# Altium PCB sanati4i4o.PcbDoc
Units mm, origin at the board's own origin, x right, y up, seen from the top; angles counter-clockwise.
Board outline 151 x 86.38 mm, 2 copper layers (Top Layer, Bottom Layer); 52 components, 43 nets, 156 pads, 0 vias.
Unrouted connection lines stored in the file: 4.
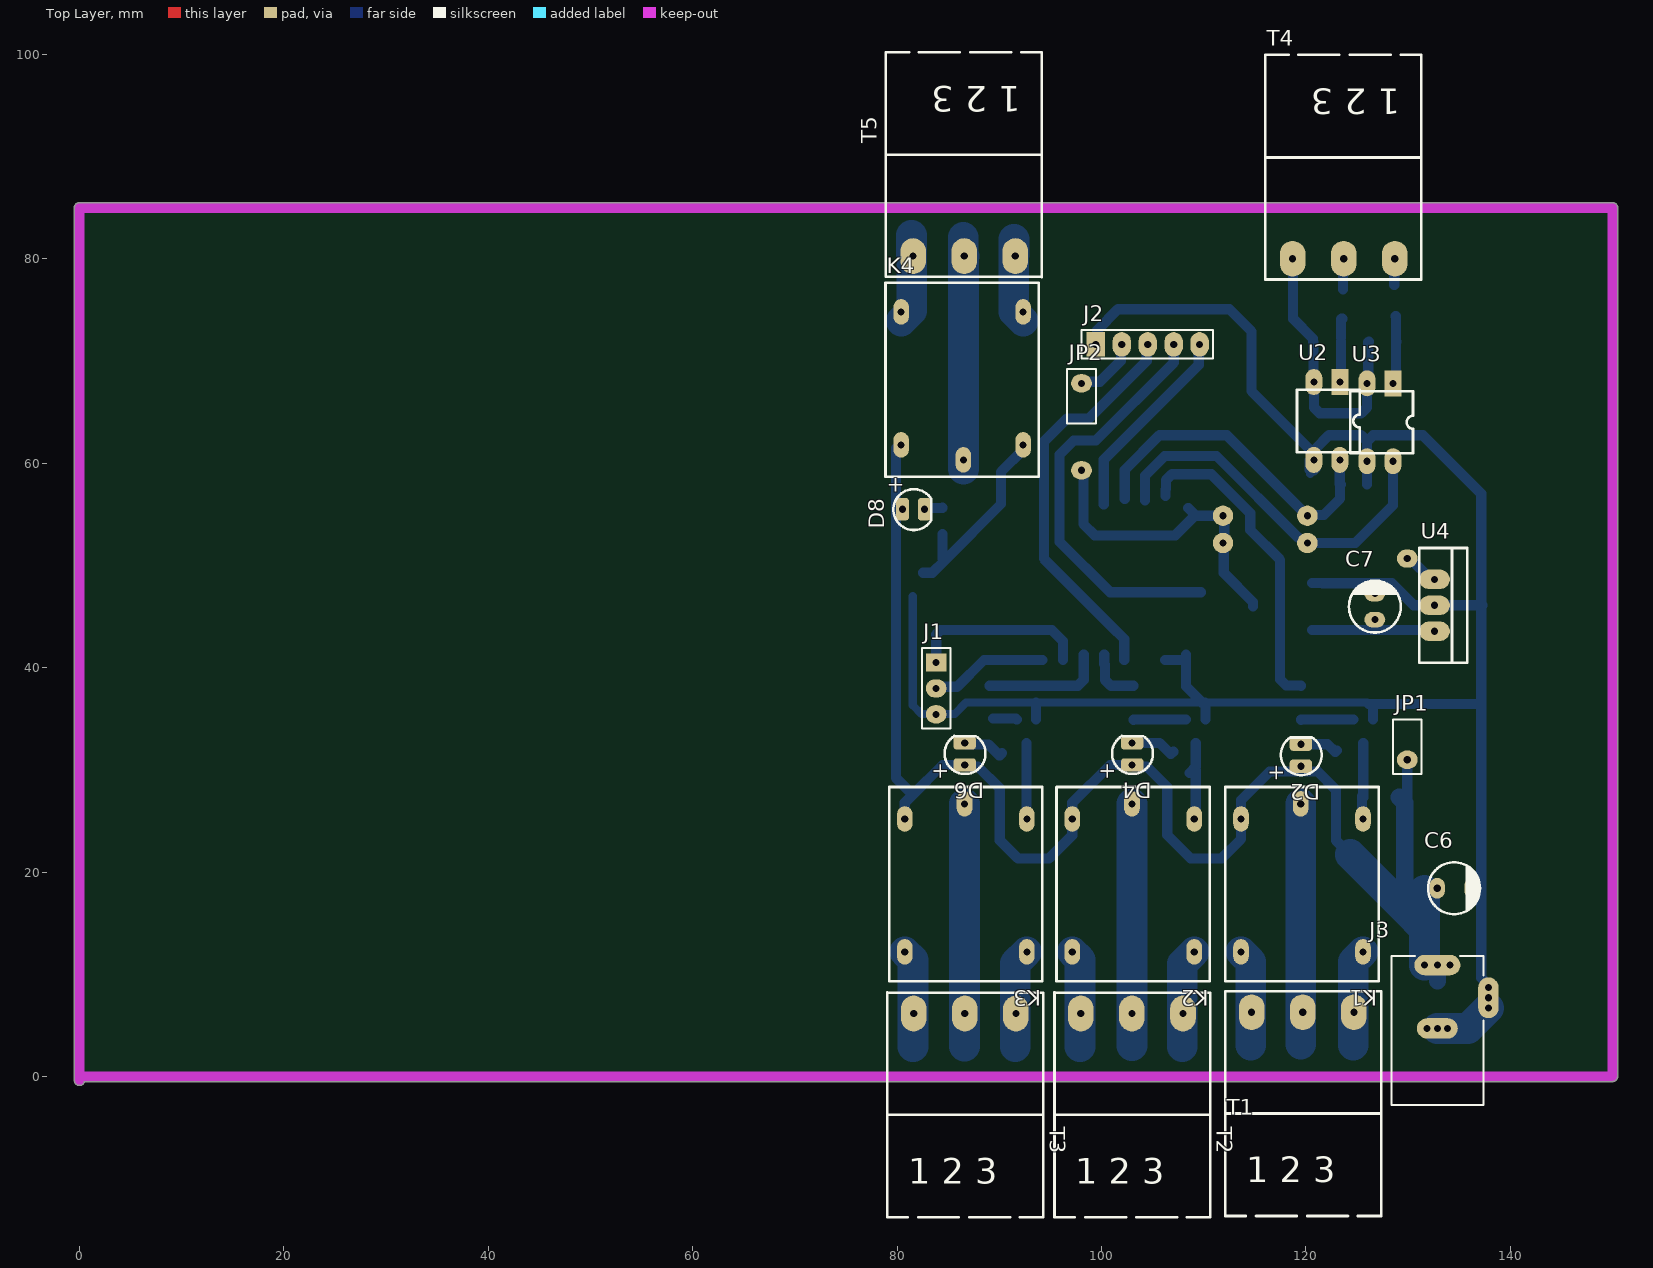
[diagram p0: Top Layer view]
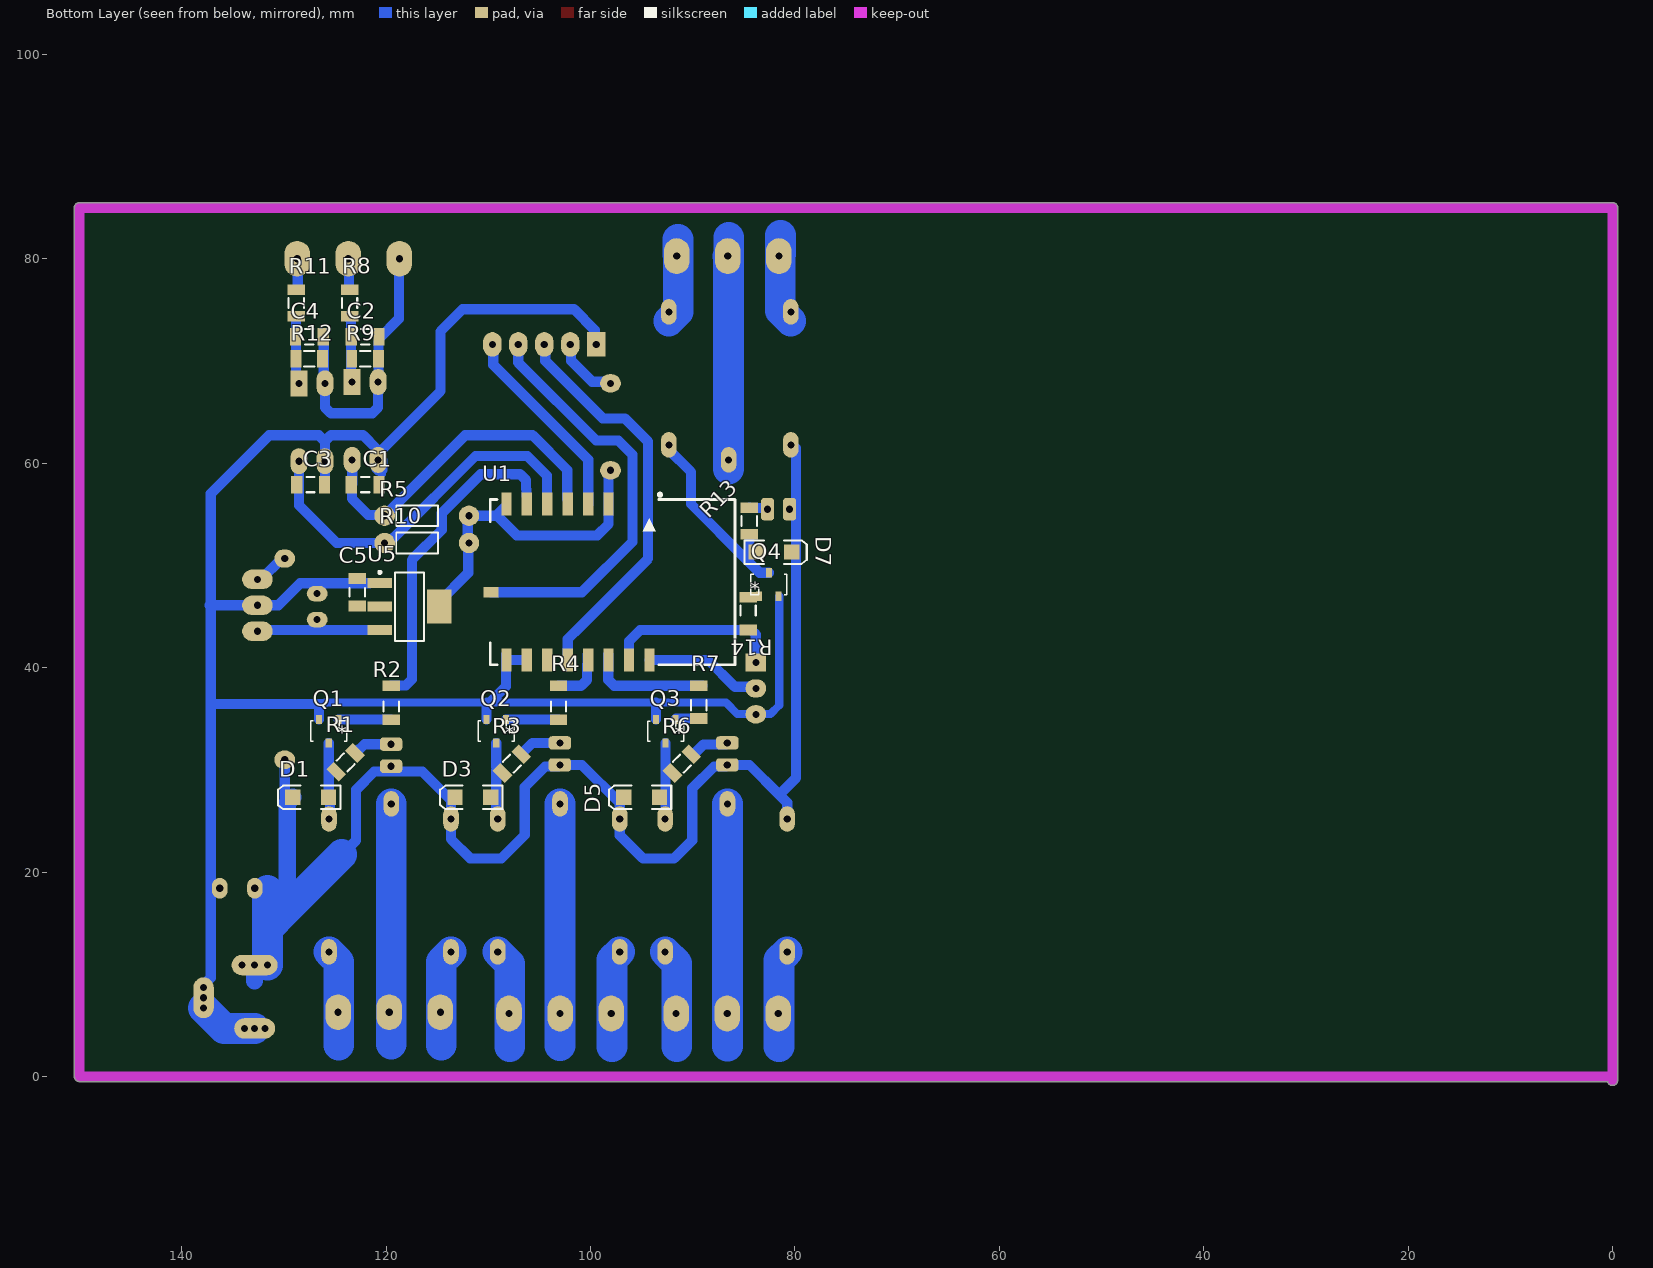
[diagram p1: Bottom Layer view, seen from below]
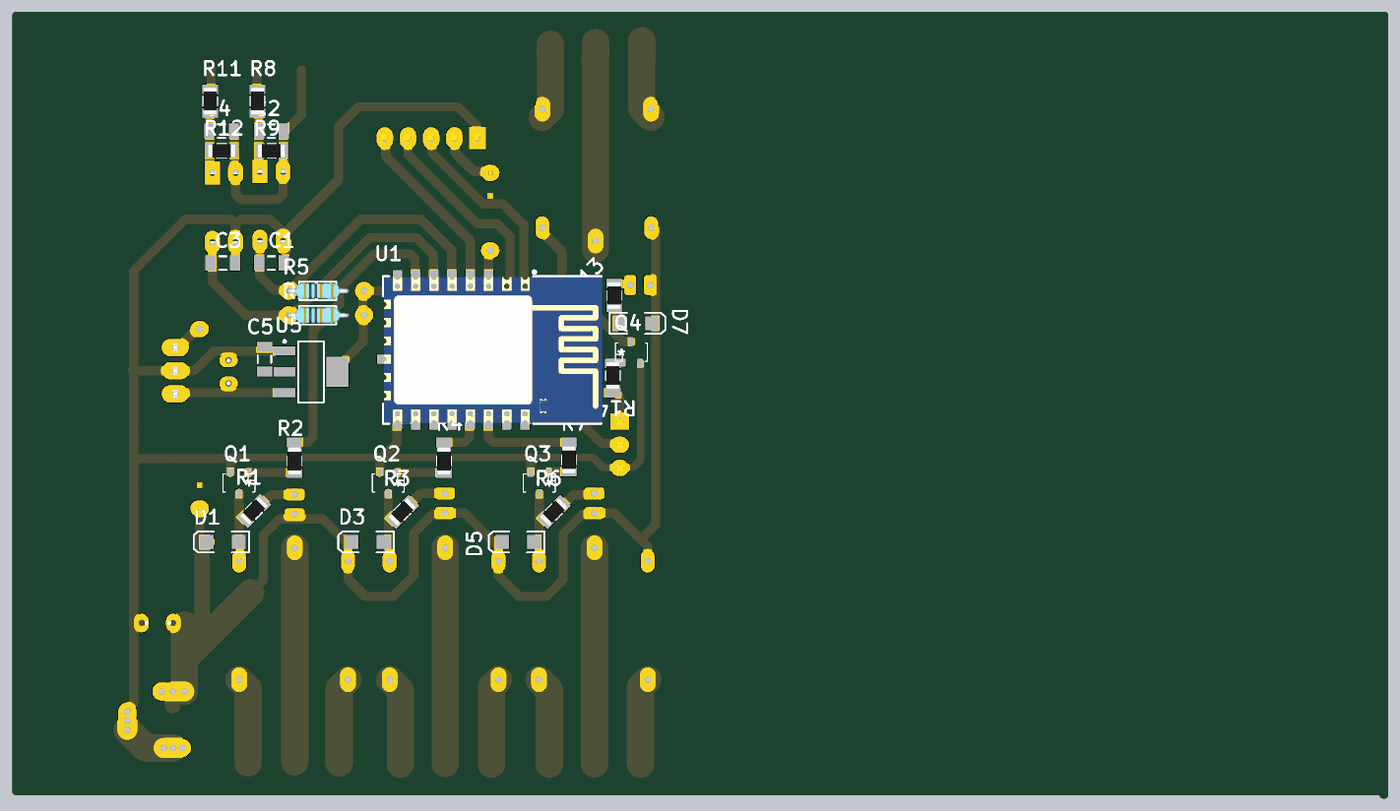
[diagram p2: 3D render of the assembled board from below, using the file's embedded part models]

## Layer stack, top to bottom
Top Solder: solder mask 0.0102, Solder Resist, Dk 3.5
Top Layer: signal copper 0.0356
Dielectric 1: dielectric 0.32, FR-4, Dk 4.8
Bottom Layer: signal copper 0.0356
Bottom Solder: solder mask 0.0102, Solder Resist, Dk 3.5

## Board outline
-0.5,-0.381 -0.5,85 cw(c0,85) 0,85.5 150,85.5 cw(c150,85) 150.5,85 150.5,0 cw(c150,0) 150,-0.5 0.486,-0.5 cw(c0,-0.381)

## Design rules (kind name [scope] priority, off if disabled: settings)
Clearance Clearance_1 [InPolygon] p1: gap=0.8 ignorepadtopadclearanceinfootprint=FALSE
Clearance [All] p2: gap=0.254 ignorepadtopadclearanceinfootprint=FALSE except(0: Arc-Hole Track-Hole SMDPad-Hole THPad-Hole Via-Hole Fill-Hole Poly-Hole Region-Hole Text-Hole)
PolygonConnect [All] p1: connectstyle=Relief reliefconductorwidth=0.254 reliefentries=4 polygonreliefangle="90 Angle" airgapwidth=0.254
RoomDefinition sanati4i4o [InComponentClass('sanati4i4o')] p1: confinementstyle=ConfineIn formatcopy=TRUE lockcomponents=FALSE outline 144.907,-4.953 247.904,-4.953 247.904,23.114 144.907,23.114
RoutingLayers [All] p1: top layer_v5=FALSE bottom layer_v5=TRUE
RoutingVias [All] p1: holewidth=0.711 width=2.5 viastyle="Through Hole" minholewidth=0.711 minwidth=1.27 maxholewidth=0.711 maxwidth=2
SolderMaskExpansion [All] p1: expansion=0.102 istentingtop=FALSE
Width [All] p1: maxlimit=3 minlimit=0.5 preferedwidth=1
29 further rules are at their usual default settings.

## Components (designator, comment, footprint, x,y, rotation, side; value= is the part's Value field where it differs from the comment)
C1 "Cap Semi" C1206 122.047,57.912 r0 bottom value=100pF
C2 "Cap Semi" C1206 122.047,72.39 r0 bottom value=100pF
C3 "Cap Semi" C1206 127.381,57.912 r0 bottom value=100pF
C4 "Cap Semi" C1206 127.508,72.39 r0 bottom value=100pF
C5 "Cap Semi" C1206 122.809,47.371 r270 bottom value=100pF
C6 "=Value" ELEC-CAP-RAD10-20#1 134.493,18.415 r180 top
C7 "=Value" ELEC-CAP-RAD10-20#2 126.746,45.974 r270 top
D1 "D Tunnel1" 3.2X1.6X1.1 127.381,27.305 r0 bottom
D2 "LED 3mm" LED-3mm 119.634,31.369 r180 top
D3 "D Tunnel1" 3.2X1.6X1.1 111.506,27.305 r0 bottom
D4 "LED 3mm" LED-3mm 103.124,31.496 r180 top
D5 "D Tunnel1" 3.2X1.6X1.1 94.996,27.305 r0 bottom
D6 "LED 3mm" LED-3mm 86.741,31.496 r180 top
D7 "D Tunnel1" 3.2X1.6X1.1 82.042,51.308 r180 bottom
D8 "LED 3mm" LED-3mm 81.534,55.372 r90 top
J1 "Header3X1" "HEADER 3X1" 83.82,40.513 r270 top
J2 "Header5X1" "HEADER 5X1" 99.441,71.628 r0 top
J3 "PWR2.5" KLD-0202 132.858,-2.801 r90 top
JP1 "Jumper" "Header 2X1"#1 129.921,32.258 r90 top
JP2 "Jumper" "Header 2X1"#2 98.044,66.548 r90 top
K1 "Relay-12vDC" Relays 127.11,28.321 r180 top
K2 "Relay-12vDC" Relays 110.6,28.321 r180 top
K3 "Relay-12vDC" Relays 94.217,28.321 r180 top
K4 "Relay-12vDC" Relays 78.867,58.674 r0 top
Q1 "MMBT3904-TP" SOT23-3 124.333,33.789 r0 bottom
Q2 "MMBT3904-TP" SOT23-3 107.95,33.789 r0 bottom
Q3 "MMBT3904-TP" SOT23-3 91.379,33.775 r0 bottom
Q4 "MMBT3904-TP" SOT23-3 83.82,48.133 r180 bottom
R1 "10K" "RES 1206 (3216X08L)"#1 123.952,30.734 r315 bottom
R2 "10K" "RES 1206 (3216X08L)"#2 119.507,36.195 r270 bottom
R3 "10K" "RES 1206 (3216X08L)"#1 107.696,30.607 r315 bottom
R4 "10K" "RES 1206 (3216X08L)"#2 103.124,36.195 r270 bottom
R5 "10K" Res-(1/4) 116.967,54.864 r180 bottom
R6 "10K" "RES 1206 (3216X08L)"#1 91.059,30.607 r315 bottom
R7 "10K" "RES 1206 (3216X08L)"#3 89.408,36.322 r270 bottom
R8 "10K" "RES 1206 (3216X08L)"#1 123.571,75.692 r270 bottom
R9 "10K" "RES 1206 (3216X08L)"#1 122.047,70.231 r0 bottom
R10 "10K" Res-(1/4) 116.967,52.197 r180 bottom
R11 "10K" "RES 1206 (3216X08L)"#1 128.778,75.692 r270 bottom
R12 "10K" "RES 1206 (3216X08L)"#1 127.508,70.231 r0 bottom
R13 "10K" "RES 1206 (3216X08L)"#1 84.455,54.356 r270 bottom
R14 "10K" "RES 1206 (3216X08L)"#3 84.582,45.593 r90 bottom
T1 "Terminal" "phoenix terminal R 3" 112.117,-13.652 r0 top
T2 "Terminal" "phoenix terminal R 3" 95.4,-13.779 r0 top
T3 "Terminal" "phoenix terminal R 3" 79.05,-13.779 r0 top
T4 "Phoenix terminal" "phoenix terminal R 3" 131.271,99.949 r180 top
T5 "Terminal" "phoenix terminal R 3" 94.14,100.203 r180 top
U1 "ESP_12_E" ESP_12_E 94.228,56.371 r270 bottom
U2 "PC817" DIP4 123.317,67.945 r270 top
U3 "PC817" DIP4 128.524,67.818 r270 top
U4 "L78XXCV" TO-220 132.588,46.101 r270 top
U5 "LM1117MP-3.3" MP04A_N 117.708,45.974 r180 bottom

## Footprints (in the part's own frame and the unit in brackets; to place one, negate y for a bottom-side part, rotate by r counter-clockwise, add the part's x,y. Pads: shape width x height; smd on the part's side, far side on the other; paste and mask are expansions set on the pad)
3.2X1.6X1.1 [mm] "SMT LED; 2 Flat Leads"
  rect 1.5x1.5 smd: 1(-1.75,0) 2(1.75,0)
  silkscreen extent -2.9,-1.15 3.2,1.15
C1206 [mm] "Chip Capacitor, Body 3.2x1.6mm, IPC High Density"
  rect 1.1x1.7 smd: 1(-1.35,0) 2(1.35,0)
  silkscreen extent -0.4,-0.75 0.4,0.75, body extent -1.7,-0.9 1.7,0.9, height 1.3
DIP4 [mm]
  rect 2.54x1.651 hole 0.7: 1(0,0)
  oval 2.54x1.651 hole 0.7: 2(0,-2.54) 3(7.62,-2.54) 4(7.62,0)
  silkscreen extent 0.76,-4.19 6.86,1.96, body extent -0.13,-3.56 7.75,1.03, height 4.3
ELEC-CAP-RAD10-20#1 [mil]
  oval 60x80 hole 27.56: 1(-70,0) 2(65,0)
  silkscreen extent -100,-100 100,100, body extent -124,-124 124,124, height 404
ELEC-CAP-RAD10-20#2 [mil]
  oval 60x80 hole 27.56: 1(-50,0) 2(50,0)
  silkscreen extent -100,-100 100,100, body extent -124,-124 124,124, height 404
ESP_12_E [mm] "ESP-12 Wi-Fi Module by AI-Thinker"
  rect 2.25x1 smd: 3(0.375,-4) 4(0.375,-6) 5(0.375,-8) 6(0.375,-10) 7(0.375,-12) 8(0.375,-14) 15(15.625,-14) 16(15.625,-12) 17(15.625,-10) 18(15.625,-8) 19(15.625,-6) 20(15.625,-4) 21(15.625,-2) 22(15.625,0)
  rect 1x1.5 smd: 12(9,-15.5)
  silkscreen extent -0.7,-15.57 16.08,8.37, body extent 0,-15.49 16,8.51, height 2.75
"Header 2X1"#1 [mil]
  oval 70x80 hole 27.56: 1(-50,0) 2(725,0)
  silkscreen extent -105,-55 105,55, body extent -100,-50 100,50, height 374
"Header 2X1"#2 [mil]
  oval 70x80 hole 27.56: 1(-285,0) 2(50,0)
  silkscreen extent -105,-55 105,55, body extent -100,-50 100,50, height 374
"HEADER 3X1" [mil]
  rect 70x80 hole 27.56: 1(0,0)
  oval 70x80 hole 27.56: 2(100,0) 3(200,0)
  silkscreen extent -55,-55 255,55, body extent -49,-50 251,50, height 330
"HEADER 5X1" [mm]
  rect 1.8x2.4 hole 0.7: 1(0,0)
  oval 1.8x2.4 hole 0.7: 2(2.54,0) 3(5.08,0) 4(7.62,0) 5(10.16,0)
  silkscreen extent -1.4,-1.4 11.46,1.4, body extent -1.22,-1.19 11.48,1.35, height 8.38
KLD-0202 [mm] "DC Power Jack, 2.5mm, KLD Series, PCB Mount"
  oval 2x4.5 hole 0.7: 1(13.7,0)
  round 1.5 hole 0.7: 1A(13.7,-1.25) 1B(13.7,1.25) 2A(7.5,-1) 2B(7.5,1) 3A(9.5,-5) 3B(11.5,-5)
  oval 2x4 hole 0.7: 2(7.5,0)
  oval 4x2 hole 0.7: 3(10.5,-5)
  silkscreen extent 0,-4.5 14.6,4.5
LED-3mm [mm] "LED; 2 Leads"
  rrect50% 2.2x1.3 hole 0.7: 1(0.127,1.016) 2(0.127,-1.143)
  silkscreen extent -1.9,-1.81 2.09,1.89
MP04A_N [mm] "SOT223, 4-Leads, Body 6.5x3.5mm, Pitch 2.3mm, Lead Span 7mm, IPC Medium Density"
  rect 2.4x1 smd: 1(-2.9,2.3) 2(-2.9,0) 3(-2.9,-2.3)
  rect 2.4x3.3 smd: 4(2.9,0)
  silkscreen extent -3.03,-3.35 1.4,3.47, body extent -1.85,-3.35 1.85,3.35, height 1.8
"phoenix terminal R 3" [mm] "3 Right terminals"
  oval 2.5x3.5 hole 0.7: 1(2.573,19.939) 2(7.573,19.939) 3(12.573,19.939)
  silkscreen extent 0,0 15.24,22
Relays [mil]
  oval 60x98.43 hole 27.56: 1(300,65) 2(60,635) 3(530,635) 4(60,123.11) 5(530,123.11)
  silkscreen extent 0,0 591,748
"RES 1206 (3216X08L)"#1 [mm] "Chip Resistor, 2-Leads, Body 3.2x1.6mm, IPC High Density _ (0.125 W)"
  rect 1.05x1.7 smd: 1(-1.295,0) 2(1.301,0)
  silkscreen extent -0.5,-0.75 0.5,0.75, body extent -1.52,-0.76 1.53,0.76, height 0.6
"RES 1206 (3216X08L)"#2 [mm] "Chip Resistor, 2-Leads, Body 3.2x1.6mm, IPC High Density _ (0.125 W)"
  rect 1.05x1.7 smd: 1(-2.032,0) 2(1.301,0)
  silkscreen extent -0.5,-0.75 0.5,0.75, body extent -1.52,-0.76 1.53,0.76, height 0.6
"RES 1206 (3216X08L)"#3 [mm] "Chip Resistor, 2-Leads, Body 3.2x1.6mm, IPC High Density _ (0.125 W)"
  rect 1.05x1.7 smd: 1(-1.905,0) 2(1.301,0)
  silkscreen extent -0.5,-0.75 0.5,0.75, body extent -1.52,-0.76 1.53,0.76, height 0.6
Res-(1/4) [mm]
  round 2 hole 0.7: 1(-3.175,0) 2(5.08,0)
  silkscreen extent -2.03,-1.02 2.03,1.02, body extent -3.43,-0.93 3.43,0.91, height 2.92
SOT23-3 [mm]
  rect 0.6x0.9 smd: 1(0.32,-1.15) 2(2.22,-1.15) 3(1.27,1.15)
  silkscreen extent -0.48,-1 3.02,1
TO-220 [mm]
  oval 1.905x3 hole 0.7: 1(-2.54,0) 2(0,0) 3(2.54,0)
  silkscreen extent -5.61,-1.5 5.61,3.19, body extent -5.61,-1.5 5.61,3.19, height 19.83

## Part data
C1 C2 C3 C4 C5: "Capacitor (Semiconductor SIM Model)", LatestRevisionDate=29-May-2009, LatestRevisionNote="IPC-7351 Footprint Added.", PackageDescription="Chip Capacitor", PackageReference=C1206, Published=8-Jun-2000, Publisher="Altium Limited"
C6 C7: library part "Capacitor Electrolytic", "Electrolytic Capacitor"
D1 D3 D5 D7: "Tunnel Diode - RLC Model", LatestRevisionDate=17-Jul-2002, LatestRevisionNote="Re-released for DXP Platform.", PackageDescription="SM LED; 2 Flat Leads", PackageReference=3.2X1.6X1.1, PackageVersion=Feb-2002, Published=8-Jun-2000, Publisher="Altium Limited"
D2 D4 D6 D8: "Typical LED", Designer="Seyed Mohsen Ghasemian", PackageDescription="LED; 2 Leads", PackageReference=LED, Published=02/04/2012, Publisher=www.picpars.com
J3: "Low Voltage Power Supply Connector", ComponentLink1Description="Manufacturer Link", ComponentLink1URL=http://domino.kycon.com/internet/Products.html, DatasheetDocument=09-May-2002, Published=17-Dec-2003, Publisher="Altium Limited"
K1 K2 K3 K4: library part Relay-05vDC, "Relay-05vDC-240AC 5A", ComponentLinkURL=www.picpars.com, Designer="Seyed Mohsen Ghasemain"
Q1 Q2 Q3 Q4: "Bipolar _BJT_ Transistor NPN 40V 200mA 300MHz 350mW Surface Mount SOT-23", Package="SOT-23 Micro Commercial", Availability=Unavailable, MF="Micro Commercial", MP=MMBT3904-TP, Price=None, SnapEDA_Link=https://www.snapeda.com/parts/MMBT3904-TP/Micro%20Commercial/view-part/805928/?ref=snap
R1 R2 R3 R4 R5 R6 R7 R8 R9 R10 R11 R12 R13 R14: library part Resistor, "Resistor", Power="1/4 W", Tolerance=5%
T1 T2 T3 T5: library part "Terminal 1*3", "phoenix terminal R 3", ComponentLinkURL=www.picpars.com, Designer="Seyed Mohsen Ghasemain", E-mail=picpars@gmail.com
T4: library part "Phoenix terminal R 3", "Right Terminal 3 Pin", ComponentLinkURL=www.picpars.com, Designer="Seyed Mohsen Ghasemain", E-mail=picpars@gmail.com
U1: "ESP-12 Wi-Fi Module by AI-Thinker", IC=ESP8266-EX, Vendor=Ai-thinker
U2 U3: library part OPTCOUPLER_01, "4-Pin Phototransistor Optocoupler"
U4: "Fixed Voltage Regulator"
U5: "800mA Low-Dropout Linear Regulator", DigiKeyPartNumber=LM1117MP-3.3CT-ND, Manufacturer="National Semiconductor", PackageTopMarking=XYTT*N05A, PowerWise=N, Code_IPC=SOT223-4, Code_JEDEC=TO-261-AA, ComponentLink1Description="LM1117 Datasheet", ComponentLink1URL=http://www.national.com/ds/LM/LM1117.pdf, ComponentLink2Description="LM1117 Web Page", ComponentLink2URL=http://www.national.com/pf/LM/LM1117.html, ComponentLink3Description="MP04A Package Page", ComponentLink3URL=http://www.national.com/packaging/folders/mp04a.html, CompType="LDO IC", DatasheetVersion=Apr-2006, PackageDescription="Molded SOT-223, 6.50 x 3.56 x 1.6mm Body, 4 Lead, 2.3mm Pitch", PackageReference=MP04A, PackageVersion="revB, Apr-2003", PartNumber=LM1117MP-3.3, PinCount=4, Published=4-Dec-2008, Publisher="Altium Limited", RoHS=O

## Nets (pads, with @x,y where several pads share a name; then routed paths per layer and width w, separated by ;. In a path a pad name is that pad's centre, name@x,y a point inside that pad or via, vN(x,y) a via of type N, cw(c..) or ccw(c..) an arc to the next point about the centre after c; other vN are vias at no path point)
cs: J2.4 U1.12 | length 41.1
  Bottom Layer w1: J2.4 107.061,69.85 99.441,62.23 97.282,62.23 95.885,60.833 95.885,52.324 100.838,47.371 U1.12
GND: C1.1 C3.1 C5.1 C6.1 C7.1 J1.3 J2.1 J3.2 J3.2A J3.2B J3.3 J3.3A J3.3B Q1.2 Q2.2 Q3.2 Q4.2 U1.15 U1.16 U2.3 U3.3 U4.2 U5.1 | length 212.4
  Bottom Layer w0.8: Q4.2@81.534,46.983 81.534,36.322 82.381,35.475 83.82,35.475 85.64,35.475 86.741,36.576 93.599,36.576 109.855,36.576 110.109,36.576 125.984,36.576 ; U2.3@120.269,59.309 U2.3@120.269,60.325 ; 120.42,58.952 U2.3@120.777,59.309
  Bottom Layer w1: Q3.2 93.599,36.576 ; J2.1 99.568,71.755 99.568,73.025 101.6,75.057 112.522,75.057 114.681,72.898 114.681,67.056 120.452,61.285 120.452,61.271 120.763,60.96 120.777,60.96 U2.3 ; U1.16 U1.15 ; U1.15@108.267,41.275 108.267,40.746 108.267,38.164 109.855,36.576 ; 110.109,36.576 110.17,36.515 Q2.2 ; U5.1 121.601,48.274 121.615,48.26 122.809,48.26 128.397,48.26 130.556,46.101 U4.2 137.287,46.101 ; U2.3@120.777,59.309 120.902,59.434 U2.3@120.902,60.325 ; U2.3@120.902,61.39 122.249,62.738 125.398,62.738 125.984,62.152 ; C3.1@125.984,57.912 U3.3 125.984,62.152 ; 126.111,36.449 126.553,36.449 137.16,36.449 ; Q1.2 126.553,36.007 ; J3.3@137.723,6.834 137.858,6.97 J3.3 J3.3B ; J3.3@137.858,8.93 137.762,8.93 137.608,9.084 137.608,9.22 137.16,9.668 137.16,36.449 ; 125.984,62.152 126.57,62.738 131.445,62.738 137.16,57.023 137.16,46.101 137.16,36.449
  Bottom Layer w3: J3.2 J3.2A 135.858,4.699 J3.3A
GND2: C2.1 C4.1 R9.1 R12.1 T4.3 U2.2 U3.2 | length 26.6
  Bottom Layer w1: T4.3@118.745,79.121 118.745,74.134 120.697,72.182 120.697,71.882 120.737,71.842 120.737,70.104 120.737,69.342 120.737,66.969 120.777,66.929 120.777,65.483 121.363,64.897 125.398,64.897 125.984,65.483 125.984,66.929 126.108,67.053 126.108,69.469 126.108,70.231 126.108,71.832 C4.1@126.158,71.882
i1: C1.2 R5.1 U1.5 U2.4 | length 32.1
  Bottom Layer w1: U1.5@102.267,56.525 102.267,57.443 102.267,59.341 105.664,62.738 112.268,62.738 R5.1 120.218,54.94 121.742,54.94 123.347,56.545 123.347,57.862 C1.2 123.317,57.992 U2.4@123.317,59.309
i2: C3.2 R10.1 U1.6 U3.4 | length 36
  Bottom Layer w1: U1.6@104.267,56.346 104.267,58.801 106.172,60.706 111.252,60.706 119.261,52.697 119.371,52.697 119.871,52.197 124.841,52.197 128.524,55.88 128.524,57.912 U3.4@128.524,59.309
NetC2_2: C2.2 R8.2 R9.2 U2.1 | length 5.9
  Bottom Layer w1: U2.1@123.444,67.945 C2.2@123.444,71.882 ; C2.2@123.444,72.263 123.444,74.112 123.469,74.137 R8.2@123.571,74.137
NetC4_2: C4.2 R11.2 R12.2 U3.1 | length 7.3
  Bottom Layer w1: R11.2 128.783,74.391 128.808,74.366 C4.2@128.808,71.932 ; U3.1@128.808,67.213 128.808,69.469 R12.2 C4.2@128.808,71.932 ; C4.2@128.858,71.882 C4.2@128.808,71.932
NetC7_2: C7.2 U4.3 U5.3 | length 12
  Bottom Layer w1: U5.3 132.475,43.674 U4.3
NetD1_1: D1.1 K1.4 Q1.3 R1.2 | length 7.6
  Bottom Layer w1: D1.1@125.476,27.432 125.476,25.934 125.586,25.824 K1.4 ; D1.1@125.603,27.305 Q1.3
NetD2_2: D2.2 R1.1 | length 3.9
  Bottom Layer w1: D2.2 122.107,32.512 122.858,31.761 122.893,31.761 R1.1@123.036,31.904
NetD3_1: D3.1 K2.4 Q2.3 R3.2 | length 8
  Bottom Layer w1: R3.2 109.22,30.292 Q2.3 ; K2.4 109.176,25.294 109.176,26.153 109.22,26.196 R3.2@109.22,29.917
NetD4_2: D4.2 R3.1 | length 4.6
  Bottom Layer w1: D4.2@102.847,32.639 D4.2@102.87,32.662 ; D4.2 105.677,32.639 106.769,31.547 106.804,31.547 R3.1@107.034,31.777
NetD5_1: D5.1 K3.4 Q3.3 R6.2 | length 7.4
  Bottom Layer w1: Q3.3 92.649,25.238 K3.4
NetD6_2: D6.2 R6.1 | length 4.3
  Bottom Layer w1: D6.2 86.764,32.489 88.936,32.489 90.005,31.42 90.04,31.42 R6.1@90.27,31.65
NetD7_1: D7.1 K4.5 Q4.3 R13.2 | length 19.7
  Bottom Layer w1: Q4.3 83.446,49.283 84.645,50.482 ; R13.2 84.455,50.673 84.645,50.482 ; K4.5 92.329,61.313 90.17,59.154 90.17,56.007 84.645,50.482
NetD8_2: D8.2 R13.1 | length 1.8
  Bottom Layer w1: D8.2 82.804,55.626 84.43,55.626 R13.1
NetJ1_2: J1.2 U1.22 | length 11.6
  Bottom Layer w1: J1.2 83.969,38.122 85.874,38.122 88.498,40.746 U1.22
NetK1_1: K1.1 T1.2 | length 23.7
  Bottom Layer w2: 119.49,3.175 119.617,3.048
  Bottom Layer w3: 119.49,3.175 K1.1
NetK1_2: K1.2 T1.3 | length 9.5
  Bottom Layer w3: 124.617,3.048 124.617,11.223 K1.2
NetK1_3: K1.3 T1.1 | length 9.5
  Bottom Layer w3: K1.3 114.617,11.223 114.617,3.048
NetK2_1: K2.1 T2.2 | length 23.8
  Bottom Layer w2: 102.9,2.921 102.98,3.001
  Bottom Layer w3: 102.98,3.001 K2.1
NetK2_2: K2.2 T2.3 | length 9.8
  Bottom Layer w3: 107.9,2.921 107.9,11.016 K2.2
NetK2_3: K2.3 T2.1 | length 9.6
  Bottom Layer w3: K2.3 97.9,11.43 97.9,2.921
NetK3_1: K3.1 T3.2 | length 23.8
  Bottom Layer w2: 86.55,2.921 86.597,2.968
  Bottom Layer w3: 86.597,2.968 K3.1
NetK3_2: K3.2 T3.3 | length 9.7
  Bottom Layer w3: 91.55,2.921 91.55,11.049 K3.2
NetK3_3: K3.3 T3.1 | length 9.6
  Bottom Layer w3: K3.3 81.55,11.397 81.55,2.921
NetK4_1: K4.1 T5.2 | length 22.5
  Bottom Layer w3: 86.487,82.092 86.487,80.344 T5.2 ; K4.1@86.504,59.436 T5.2@86.504,80.073
NetK4_2: K4.2 T5.3 | length 8.5
  Bottom Layer w3: K4.2@80.408,73.914 81.424,74.93 T5.3@81.424,80.073 ; T5.3@81.407,80.424 81.407,82.296
NetK4_3: K4.3 T5.1 | length 8.1
  Bottom Layer w3: T5.1@91.424,80.073 91.424,74.836 K4.3@92.346,73.914 ; T5.1@91.44,80.391 T5.1@91.44,81.915
NetQ1_1: Q1.1 R2.2 | length 5.2
  Bottom Layer w1: R2.2 119.532,34.919 120.2,34.919 120.205,34.925 124.639,34.925 Q1.1
NetQ2_1: Q2.1 R4.2 | length 5.2
  Bottom Layer w1: R4.2 103.149,34.919 103.817,34.919 103.822,34.925 108.256,34.925 Q2.1
NetQ3_1: Q3.1 R7.2 | length 2.3
  Bottom Layer w1: R7.2 91.603,35.021 Q3.1
NetQ4_1: Q4.1 R14.2
NetR8_1: R8.1 T4.2 | length 2.2
  Bottom Layer w1: R8.1@123.634,76.987 123.634,79.057 T4.2@123.698,79.121
NetR11_1: R11.1 T4.1 | length 1.7
  Bottom Layer w1: R11.1@128.651,77.47 T4.1@128.651,79.121
o1: R2.1 U1.7 | length 31.4
  Bottom Layer w1: U1.7@106.267,56.781 106.267,57.443 106.299,57.475 106.299,58.342 106.885,58.928 110.744,58.928 114.554,55.118 114.554,53.467 117.475,50.546 117.475,38.838 118.061,38.252 119.482,38.252 R2.1
o2: R4.1 U1.19 | length 5.5
  Bottom Layer w1: U1.19@100.267,41.275 100.267,40.357 100.33,40.294 100.33,38.813 100.916,38.227 R4.1
o3: R7.1 U1.20 | length 12.3
  Bottom Layer w1: R7.1@89.058,38.227 97.681,38.227 98.267,38.813 U1.20@98.267,41.275 ; R7.1@89.06,38.227 R7.1
o4: J1.1 R14.1 U1.21 | length 17.6
  Bottom Layer w1: J1.1 83.82,43.251 84.257,43.688 R14.1 95.123,43.688 96.228,42.583 U1.21
sck: J2.3 U1.18 | length 39.6
  Bottom Layer w1: U1.18 102.228,42.806 100.965,44.069 94.361,50.673 94.361,62.103 96.647,64.389 98.806,64.389 104.436,70.019 104.436,71.543 J2.3
so: J2.5 U1.4 | length 19.5
  Bottom Layer w1: U1.4 100.228,60.35 109.516,69.638 109.516,71.543 J2.5
VCC: C6.2 D1.2 D2.1 D3.2 D4.1 D5.2 D6.1 D7.2 D8.1 J3.1 J3.1A J3.1B JP1.1 JP1.2 K1.5 K2.5 K3.5 K4.4 U4.1 | length 151.3
  Bottom Layer w1: K4.4@79.883,61.505 79.883,29.21 81.526,27.567 ; K3.5 80.755,26.797 81.526,27.567 ; 124.333,21.717 122.936,23.114 122.936,28.067 121.158,29.845 116.459,29.845 113.648,27.034 K1.5 113.648,23.224 111.76,21.336 108.712,21.336 106.426,23.622 106.426,28.321 104.417,30.33 103.147,30.33 D4.1 100.838,30.48 97.138,26.78 K2.5 97.138,23.605 94.869,21.336 91.821,21.336 90.043,23.114 90.043,28.194 87.907,30.33 86.764,30.33 D6.1 84.438,30.48 81.526,27.567 ; 129.667,25.908 129.921,26.162 JP1.1 ; JP1.2 130.207,50.673 132.239,48.641 U4.1
  Bottom Layer w1.7: D1.2 129.667,26.769 129.667,25.908 129.667,16.383 ; 132.878,9.344 J3.1@132.878,10.899
  Bottom Layer w3: 124.333,21.717 129.667,16.383 131.608,14.442 ; J3.1B 131.608,14.442 ; 131.608,18.197 131.608,14.442
vDD: C5.2 J2.2 JP2.1 JP2.2 R5.2 R10.2 U1.3 U1.8 U5.2 U5.4 | length 37.6
  Bottom Layer w1: JP2.1 98.228,59.125 U1.3 98.228,54.049 99.339,52.938 107.213,52.938 109.085,54.81 ; JP2.2 98.193,67.967 99.844,67.967 101.896,70.019 101.896,71.543 J2.2 ; U1.8@108.476,55.619 109.232,54.864 R5.2 111.963,54.788 111.963,54.507 112.017,54.454 112.017,52.434 R10.2@111.963,52.38 ; R10.2 111.963,52.121 111.963,49.269 114.808,46.424 U5.4
pads on no net: U1.17

## Keep-outs
Keep-Out Layer:
  lines w1: 0,-0.381 0,85 150,85 150,0 0,0

## Text inside footprints (layer, text, board x,y; h text height)
D2: Top Overlay "+" at 116.459,30.607 h1.52 r270
D4: Top Overlay "+" at 99.949,30.734 h1.52 r270
D6: Top Overlay "+" at 83.566,30.734 h1.52 r270
D8: Top Overlay "+" at 80.772,58.547 h1.52 r180
J3: Mechanical 1 "Mech 2 - Clearance, move to internal plane if present" at 127.792,-2.515 h0.3 r90; Mechanical 1 "Mech 1 - Slot cut-out" at 127.292,-2.515 h0.3 r90; Mechanical 1 "Assign keep-out area to slot" at 126.292,-2.515 h0.3 r90; Mechanical 1 "Alert PCB fab to slot details" at 126.792,-2.515 h0.3 r90
Q1: Bottom Overlay "*" at 123.853,34.789 h1.27 r180
Q2: Bottom Overlay "*" at 107.47,34.789 h1.27 r180
Q3: Bottom Overlay "*" at 90.899,34.775 h1.27 r180
Q4: Bottom Overlay "*" at 84.3,47.133 h1.27
T1: Top Overlay "1 2 3" at 114.149,-10.35 h2.5
T2: Top Overlay "1 2 3" at 97.432,-10.477 h2.5
T3: Top Overlay "1 2 3" at 81.082,-10.477 h2.5
T4: Top Overlay "1 2 3" at 129.239,96.647 h2.5 r180
T5: Top Overlay "1 2 3" at 92.108,96.901 h2.5 r180
U1: Mechanical 13 "CUTOUT POLYGON" at 86.862,56.244 h0.25 r90; Mechanical 13 "ANTENNA AREA" at 86.354,56.244 h0.25 r90